# Altium PCB JacdacBrainNRF 57.PcbDoc (part 1 of 2)
Units mm, origin at the board's own origin, x right, y up, seen from the top; angles counter-clockwise.
Board outline 33.2 x 27.66 mm, 2 copper layers (Top Layer, Bottom Layer), stack 1.525 mm thick; 62 components, 38 nets, 255 pads, 60 vias.
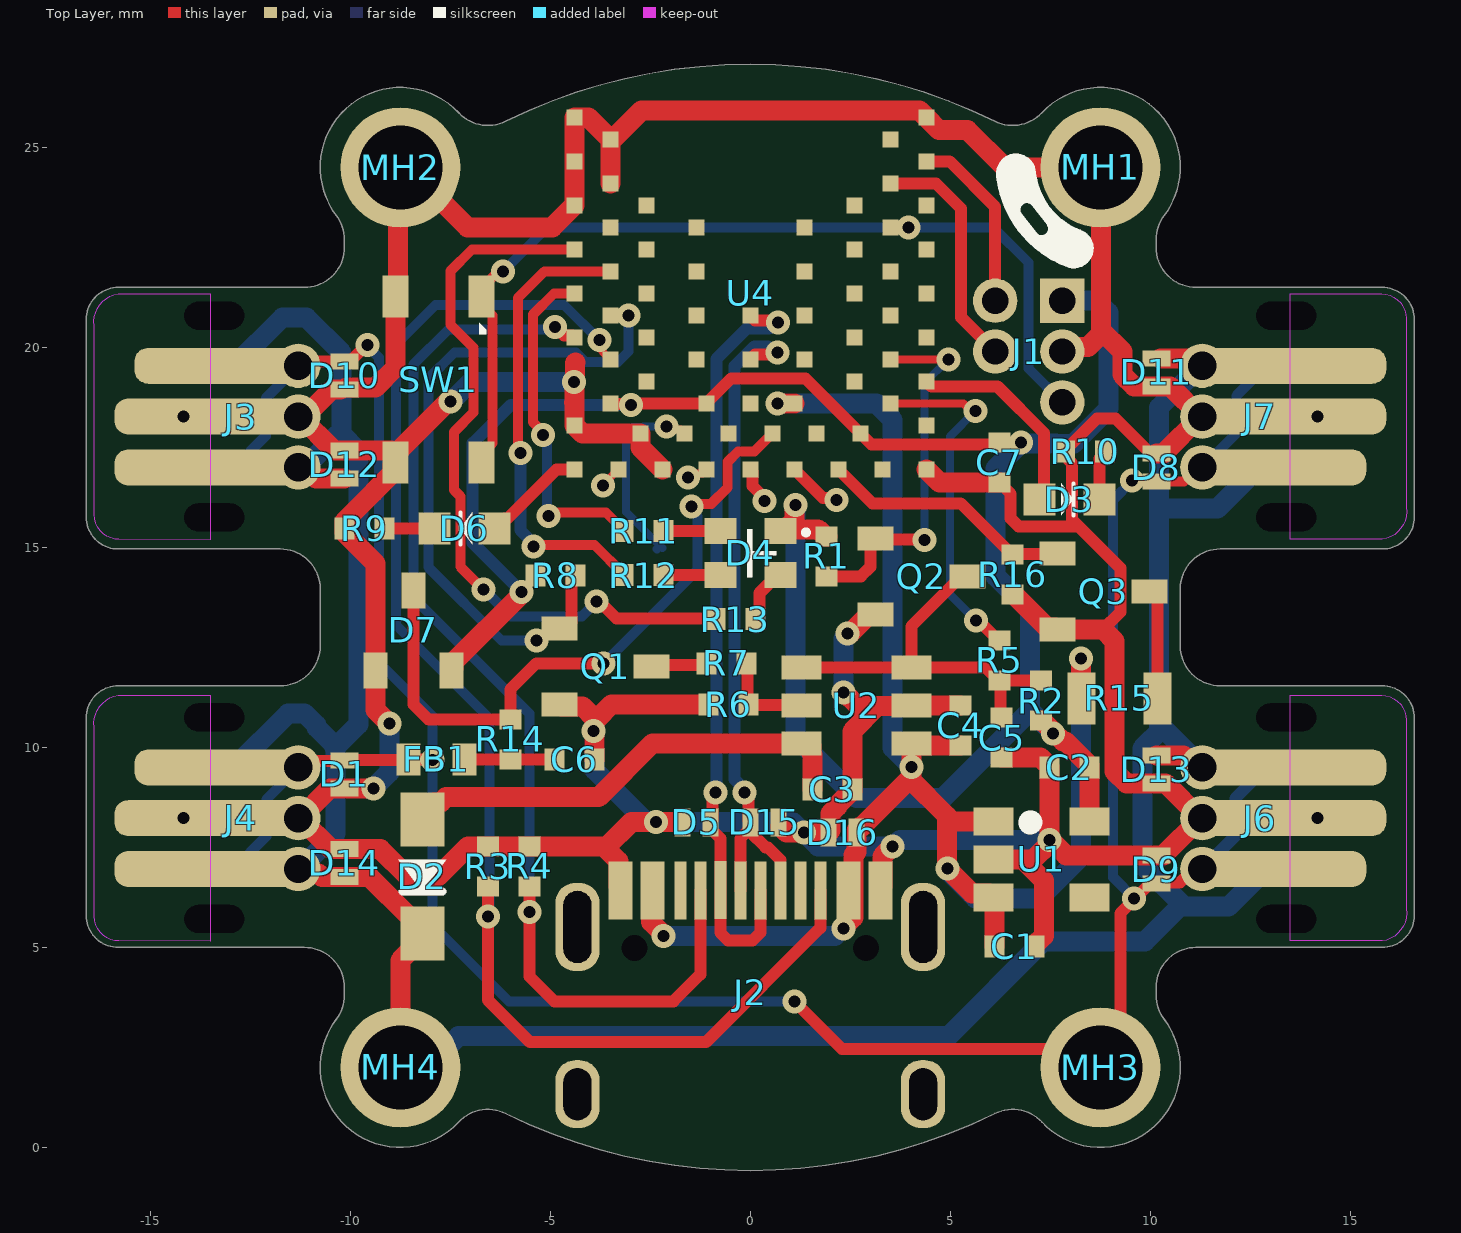
[diagram p0: Top Layer view]
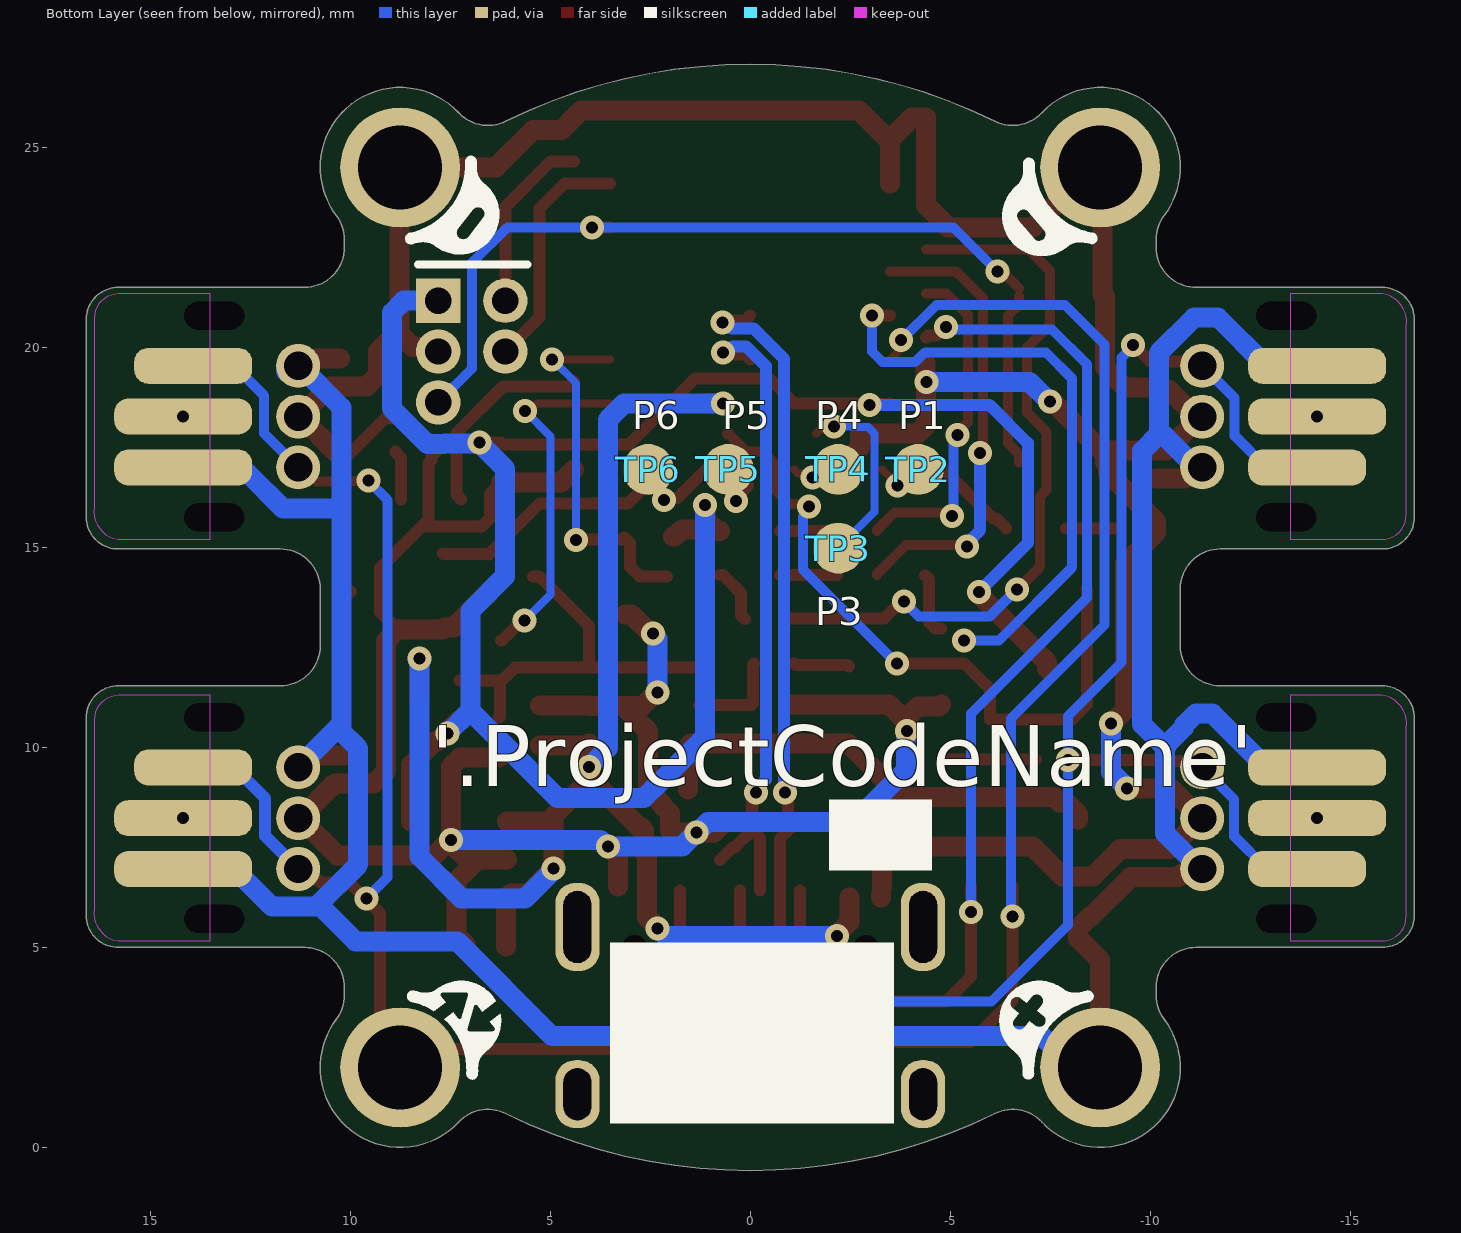
[diagram p1: Bottom Layer view, seen from below]

## Layer stack, top to bottom
Top Solder: solder mask 0.0102, Solder Resist, Dk 3.5
Top Layer: signal copper 0.0356
Dielectric 1: core 1.454, FR-4, Dk 4.2
Bottom Layer: signal copper 0.0356
Bottom Solder: solder mask 0.0102, Solder Resist, Dk 3.5

## Board outline
-16.601,5.8 ccw(c-15.802,5.799) -15.8,5 -11.75,5 -11.146,4.999 cw(c-11.147,3.999) -10.147,3.998 -10.147,3.803 cw(c-11.147,3.805) -10.349,3.203 ccw(c-8.751,2) -7.29,0.634 cw(c-6.56,-0.049) -6.118,0.848 ccw(c0,13.25) 6.117,0.848 cw(c6.559,-0.049) 7.289,0.634 ccw(c8.75,2) 10.348,3.203 cw(c11.146,3.805) 10.146,3.803 10.146,3.998 cw(c11.146,3.999) 11.145,4.999 11.749,5 15.799,5 ccw(c15.801,5.799) 16.6,5.8 16.6,10.74 ccw(c15.801,10.741) 15.799,11.54 11.749,11.54 cw(c11.749,12.54) 10.749,12.54 10.749,13.96 cw(c11.749,13.96) 11.749,14.96 15.799,14.96 ccw(c15.801,15.759) 16.6,15.76 16.6,20.7 ccw(c15.801,20.701) 15.799,21.5 11.749,21.5 11.145,21.501 cw(c11.146,22.501) 10.146,22.502 10.146,22.697 cw(c11.146,22.695) 10.348,23.297 ccw(c8.75,24.5) 7.289,25.866 cw(c6.559,26.549) 6.117,25.652 ccw(c-0.001,13.25) -6.118,25.652 cw(c-6.56,26.549) -7.29,25.866 ccw(c-8.751,24.5) -10.349,23.297 cw(c-11.147,22.695) -10.147,22.697 -10.147,22.502 cw(c-11.147,22.501) -11.146,21.501 -11.75,21.5 -15.8,21.5 ccw(c-15.802,20.701) -16.601,20.7 -16.601,15.76 ccw(c-15.802,15.759) -15.8,14.96 -11.75,14.96 cw(c-11.75,13.96) -10.75,13.96 -10.75,12.54 cw(c-11.75,12.54) -11.75,11.54 -15.8,11.54 ccw(c-15.802,10.741) -16.601,10.74

## Design rules (kind name [scope] priority, off if disabled: settings)
AssemblyTestPointUsage [All] p1: valid=2
BoardOutlineClearance [All] p1: gap=0.3 ignorepadtopadclearanceinfootprint=FALSE except(0: Arc-SplitContinuation Track-SplitContinuation SMDPad-OutlineEdge SMDPad-SplitContinuation THPad-OutlineEdge THPad-SplitContinuation Via-SplitContinuation Fill-SplitContinuation Poly-SplitContinuation Region-OutlineEdge Region-SplitContinuation Text-SplitContinuation; 0.2: Track-OutlineEdge Text-OutlineEdge)
Clearance [All] p1: gap=0.125 ignorepadtopadclearanceinfootprint=FALSE except(0: Arc-Hole Track-Hole SMDPad-Hole THPad-Hole Via-Hole Fill-Hole Poly-Hole Region-Hole Text-Hole)
ComponentClearance [All] p1: gap=0.2 collisioncheckmode=3 verticalgap=0.2 showdistances=FALSE
DiffPairsRouting [All] p1: maxlimit=2 minlimit=0.15 mostfreqgap=0.15 toplayer_minwidth=0.15 toplayer_maxwidth=2 toplayer_prefwidth=0.15 bottomlayer_minwidth=0.15 bottomlayer_maxwidth=2 bottomlayer_prefwidth=0.15 substack1={CB9D278B-8BF5-444A-AAF4-837A2A9DF42D} toplayer_{cb9d278b-8bf5-444a-aaf4-837a2a9df42d}_minwidth=0.381 toplayer_{cb9d278b-8bf5-444a-aaf4-837a2a9df42d}_maxwidth=0.381 toplayer_{cb9d278b-8bf5-444a-aaf4-837a2a9df42d}_prefwidth=0.381 bottomlayer_{cb9d278b-8bf5-444a-aaf4-837a2a9df42d}_minwidth=0.381 bottomlayer_{cb9d278b-8bf5-444a-aaf4-837a2a9df42d}_maxwidth=0.381 bottomlayer_{cb9d278b-8bf5-444a-aaf4-837a2a9df42d}_prefwidth=0.381 substack2={826B8647-A721-4255-895A-19F9591B9CD1} toplayer_{826b8647-a721-4255-895a-19f9591b9cd1}_minwidth=0.381 toplayer_{826b8647-a721-4255-895a-19f9591b9cd1}_maxwidth=0.381 toplayer_{826b8647-a721-4255-895a-19f9591b9cd1}_prefwidth=0.381 bottomlayer_{826b8647-a721-4255-895a-19f9591b9cd1}_minwidth=0.381 bottomlayer_{826b8647-a721-4255-895a-19f9591b9cd1}_maxwidth=0.381 bottomlayer_{826b8647-a721-4255-895a-19f9591b9cd1}_prefwidth=0.381 substack3={E64FCAF4-1BC8-437D-B1E0-0E5F2DC0F59E} toplayer_{e64fcaf4-1bc8-437d-b1e0-0e5f2dc0f59e}_minwidth=0.381 toplayer_{e64fcaf4-1bc8-437d-b1e0-0e5f2dc0f59e}_maxwidth=0.381 toplayer_{e64fcaf4-1bc8-437d-b1e0-0e5f2dc0f59e}_prefwidth=0.381 bottomlayer_{e64fcaf4-1bc8-437d-b1e0-0e5f2dc0f59e}_minwidth=0.381 bottomlayer_{e64fcaf4-1bc8-437d-b1e0-0e5f2dc0f59e}_maxwidth=0.381 bottomlayer_{e64fcaf4-1bc8-437d-b1e0-0e5f2dc0f59e}_prefwidth=0.381 substack4={E61CE66C-507C-4E1E-8E83-C905434AFC1C} toplayer_{e61ce66c-507c-4e1e-8e83-c905434afc1c}_minwidth=0.381 toplayer_{e61ce66c-507c-4e1e-8e83-c905434afc1c}_maxwidth=0.381 toplayer_{e61ce66c-507c-4e1e-8e83-c905434afc1c}_prefwidth=0.381 bottomlayer_{e61ce66c-507c-4e1e-8e83-c905434afc1c}_minwidth=0.381 bottomlayer_{e61ce66c-507c-4e1e-8e83-c905434afc1c}_maxwidth=0.381 bottomlayer_{e61ce66c-507c-4e1e-8e83-c905434afc1c}_prefwidth=0.381 maxuncoupledlength=25
FabricationTestPointUsage [All] p1: valid=2 allowmultiple=FALSE
HoleSize [All] p1: absolutevalues=TRUE maxlimit=2.54 minlimit=0.2 maxpercent=80.000 minpercent=20.000
MatchedLengths USB_DATA [InDifferentialPair('USB_D')] p1: tolerance=25.4 checknetsindiffpair=FALSE checkdiffpairvsdiffpair=TRUE checkxsignals=TRUE checkothers=TRUE
MinimumSolderMaskSliver [All] p1: minsoldermaskwidth=0.005
PlaneClearance [All] p1: clearance=0.3
PlaneConnect [All] p1: planeconnectstyle=Relief reliefexpansion=0.5 reliefentries=4 reliefconductorwidth=0.2 reliefairgap=0.3
PolygonConnect "PolygonConnect GND" [isVIA] p1: connectstyle=Relief reliefconductorwidth=0.2 reliefentries=4 polygonreliefangle="90 Angle" airgapwidth=0.2
PolygonConnect [All] p2: connectstyle=Relief reliefconductorwidth=0.2 reliefentries=4 polygonreliefangle="90 Angle" airgapwidth=0.2
RoutingVias [All] p1: holewidth=0.3 width=0.6 viastyle="Through Hole" minholewidth=0.3 minwidth=0.6 maxholewidth=0.3 maxwidth=0.8
SignalStimulus "Schematic Signal Stimulus_1" [InNet('USB_D_P')] p1: kind=1 level=1 starttime=0.000 stoptime=500.0m periodtime=1.000
SignalStimulus "Schematic Signal Stimulus" [InNet('USB_D_N')] p2: kind=1 level=1 starttime=0.000 stoptime=41.67n periodtime=83.33n
SilkToSilkClearance [All] p1: silktosilkclearance=0.001
SilkToSolderMaskClearance [IsPad] p1: minsilkscreentomaskgap=0.05 clearancetoexposedcopper=TRUE
SolderMaskExpansion TENTED_VIA [IsVia] p1: expansion=0.102 istentingtop=TRUE
SolderMaskExpansion [All] p2: expansion=0.075 istentingtop=FALSE
Width [All] p1: maxlimit=2 minlimit=0.152 preferedwidth=0.152 substack1={CB9D278B-8BF5-444A-AAF4-837A2A9DF42D} toplayer_{cb9d278b-8bf5-444a-aaf4-837a2a9df42d}_minwidth=0.15 toplayer_{cb9d278b-8bf5-444a-aaf4-837a2a9df42d}_prefwidth=0.15 bottomlayer_{cb9d278b-8bf5-444a-aaf4-837a2a9df42d}_minwidth=0.15 bottomlayer_{cb9d278b-8bf5-444a-aaf4-837a2a9df42d}_prefwidth=0.15 substack2={826B8647-A721-4255-895A-19F9591B9CD1} toplayer_{826b8647-a721-4255-895a-19f9591b9cd1}_minwidth=0.15 toplayer_{826b8647-a721-4255-895a-19f9591b9cd1}_prefwidth=0.15 bottomlayer_{826b8647-a721-4255-895a-19f9591b9cd1}_minwidth=0.15 bottomlayer_{826b8647-a721-4255-895a-19f9591b9cd1}_prefwidth=0.15 substack3={E64FCAF4-1BC8-437D-B1E0-0E5F2DC0F59E} toplayer_{e64fcaf4-1bc8-437d-b1e0-0e5f2dc0f59e}_minwidth=0.15 toplayer_{e64fcaf4-1bc8-437d-b1e0-0e5f2dc0f59e}_prefwidth=0.15 bottomlayer_{e64fcaf4-1bc8-437d-b1e0-0e5f2dc0f59e}_minwidth=0.15 bottomlayer_{e64fcaf4-1bc8-437d-b1e0-0e5f2dc0f59e}_prefwidth=0.15 substack4={E61CE66C-507C-4E1E-8E83-C905434AFC1C} toplayer_{e61ce66c-507c-4e1e-8e83-c905434afc1c}_minwidth=0.15 toplayer_{e61ce66c-507c-4e1e-8e83-c905434afc1c}_prefwidth=0.15 bottomlayer_{e61ce66c-507c-4e1e-8e83-c905434afc1c}_minwidth=0.15 bottomlayer_{e61ce66c-507c-4e1e-8e83-c905434afc1c}_prefwidth=0.15 minimp=50.000000 maximp=50.000000 favimp=50.000000
20 further rules are at their usual default settings.

## Classes and differential pairs
differential pair USB_D: +USB_D_P -USB_D_N

## Components (designator, comment, footprint, x,y, rotation, side; value= is the part's Value field where it differs from the comment)
C1 "CL05A105KP5NNNC" "C0402_0.55MM - without outline" 6.6,5.025 r180 top
C2 "CL05A105KP5NNNC" "C0402_0.55MM - without outline" 7.975,9.5 r0 top
C3 "CL05A475MP5NRNC" "R0402 - Without outline" 2.05,8.95 r180 top
C4 "CL05A475MP5NRNC" "R0402 - Without outline" 5.25,10.55 r270 top
C5 "CL05A475MP5NRNC" "R0402 - Without outline" 6.284,10.241 r90 top
C6 "CL05C330JB51PNC" "C0402_0.55MM - without outline" -4.4,9.7 r180 top
C7 "CL05A475MP5NRNC" "R0402 - Without outline" 6.225,17.125 r90 top
D1 "RCLAMP0521P-N" "TVS 0402 - L" -10.15,9.325 r270 top
D2 "MBR120VLSFT3G" MBR120VLSFT3G -8.2,6.775 r90 top
D3 "Everlight Elec'''" "0603 Green" 7.975,16.197 r180 top
D4 "TZ-P4-1615RGBTCA1-0.55T" TZ-P4-1615RGBTCA1-0.55T 0,14.855 r180 top
D5 "RCLAMP0521P-N" "TVS 0402 - L" -1.35,8.125 r180 top
D6 "Everlight Elec'''" "0603 Orange" -7.15,15.475 r0 top
D7 "BAT54S" NXP-BAT54S-TO-236AB -8.425,12.925 r90 top
D8 "RCLAMP0521P-N" "TVS 0402 - L" 10.15,17 r90 top
D9 "RCLAMP0521P-N" "TVS 0402 - L" 10.15,6.95 r90 top
D10 "RCLAMP0521P-N" "TVS 0402 - L" -10.15,19.3 r270 top
D11 "RCLAMP0521P-N" "TVS 0402 - L" 10.15,19.375 r270 top
D12 "RCLAMP0521P-N" "TVS 0402 - L" -10.15,17.075 r90 top
D13 "RCLAMP0521P-N" "TVS 0402 - L" 10.15,9.45 r270 top
D14 "RCLAMP0521P-N" "TVS 0402 - L" -10.15,7.104 r90 top
D15 "RCLAMP0521P-N" "TVS 0402 - L" 0.35,8.125 r0 top
D16 "RCLAMP0521P-N" "TVS 0402 - L" 2.3,7.875 r180 top
FB1 "TDK MPZ1608S102ATA00" "TDK MPZ1608 0.8mm - without outline" -7.85,9.7 r0 top
J1 "Hack Connect Mini 1.27 mm pitch 2-row" HACK_CONNECT_MINI_5_X_1_27 7.8,21.166 r180 top
J2 "TYPE-C-31-M-12" TYPE-C-31-M-12 0,6.425 r0 top
J3 "3 pin JACDAC edge connector" JACDAC_EDGE_CONNECTOR_NO_TRACES#1 -10.75,18.27 r90 top
J4 "3 pin JACDAC edge connector" JACDAC_EDGE_CONNECTOR_NO_TRACES#2 -10.75,8.23 r90 top
J6 "3 pin JACDAC edge connector" JACDAC_EDGE_CONNECTOR_NO_TRACES#1 10.75,8.23 r270 top
J7 "3 pin JACDAC edge connector" JACDAC_EDGE_CONNECTOR_NO_TRACES#1 10.75,18.27 r270 top
MH1 "MH_5.0MMK_3.0MMC_2.1MMD_PTH" MH_5.0MMK_3.0MMC_2.1MMD_PTH 8.75,24.5 r0 top
MH2 "MH_5.0MMK_3.0MMC_2.1MMD_PTH" MH_5.0MMK_3.0MMC_2.1MMD_PTH -8.75,24.5 r180 top
MH3 "MH_5.0MMK_3.0MMC_2.1MMD_PTH" MH_5.0MMK_3.0MMC_2.1MMD_PTH 8.75,2 r270 top
MH4 "MH_5.0MMK_3.0MMC_2.1MMD_PTH" MH_5.0MMK_3.0MMC_2.1MMD_PTH -8.75,2 r270 top
Q1 "2N7002K-T1-GE3" "SOT-23-3 (TO-236)" -3.625,12.025 r0 top
Q2 "2N7002K-T1-GE3" "SOT-23-3 (TO-236)" 4.275,14.275 r0 top
Q3 "2N7002K-T1-GE3" "SOT-23-3 (TO-236)" 8.825,13.9 r0 top
R1 "" "R0402 - Without outline" 1.9,14.775 r270 top
R2 "RC0402FR-07330KL" "R0402 - Without outline" 7.274,11.166 r90 top
R3 "RC0402JR-075K1L" "R0402 - Without outline" -6.56,7.025 r90 top
R4 "RC0402JR-075K1L" "R0402 - WITHOUT OUTLINE" -5.525,7.025 r90 top
R5 "RC0402FR-07150RL" "R0402 - Without outline" 6.225,12.175 r270 top
R6 "RC0402FR-0752K3L" "R0402 - Without outline" -0.55,11.075 r0 top
R7 "RT0402FRE0768KL" "R0402 - Without outline" -0.6,12.1 r0 top
R8 "" "R0402 - Without outline" -4.875,14.3 r0 top
R9 "RC0402FR-07150RL" "R0402 - Without outline" -9.65,15.475 r180 top
R10 "RC0402FR-07150RL" "R0402 - Without outline" 8.374,17.399 r180 top
R11 "RC0402FR-0730RL" "R0402 - Without outline" -2.663,15.405 r180 top
R12 "RC0402FR-0730RL" "R0402 - Without outline" -2.663,14.305 r180 top
R13 "RC0402FR-07150RL" "R0402 - Without outline" -0.37,13.206 r180 top
R14 "RC0402FR-07220RL" "R0402 - Without outline" -6,10.2 r270 top
R15 "CRGP0805F100R" RES0805 9.225,11.225 r180 top
R16 "RC0402FR-07100KL" "R0402 - Without outline" 6.559,14.326 r90 top
SW1 "UK-B0267-SP25Y" USAKRO-UK-B0267-SP25Y -7.8,19.2 r270 top
TP2 "TestPoint" Pad1.27mm#1 -4.575,16.963 r180 bottom
TP3 "TestPoint" Pad1.27mm#2 -2.377,14.98 r180 bottom
TP4 "TestPoint" Pad1.27mm#3 -2.2,16.963 r180 bottom
TP5 "TestPoint" Pad1.27mm#4 0.55,17.375 r180 bottom
TP6 "TestPoint" Pad1.27mm#5 2.25,17.7 r180 bottom
U1 "LDO 3.3V/300 mA" "ON_SEMI-SOT23-5 - without outline" 7.275,7.2 r0 top
U2 "TPS2553DBVR" TI-TPS2553 2.65,11.05 r180 top
U4 "Fanstel Nordic NRF52833 module" BM833 0,23.4 r0 top

## Footprints (in the part's own frame and the unit in brackets; to place one, negate y for a bottom-side part, rotate by r counter-clockwise, add the part's x,y. Pads: shape width x height; smd on the part's side, far side on the other; paste and mask are expansions set on the pad)
"0603 Green" [mm]
  rect 0.8x0.8 smd paste-0.05: 1(-0.75,0) 2(0.75,0)
  silkscreen extent -0.1,-0.4 0.2,0.4, body extent -0.79,-0.4 0.81,0.4, height 0.4
"0603 Orange" [mm]
  rect 0.8x0.8 smd paste-0.05: 1(-0.75,0) 2(0.75,0)
  silkscreen extent -0.1,-0.4 0.2,0.4, body extent -0.79,-0.4 0.81,0.4, height 0.4
BM833 [mm]
  rect 0.4x0.4 smd paste-0.254: 1(-4.4,2.35) 2(-3.5,1.8) 3(-4.4,1.25) 4(-3.5,0.7) 5(-4.4,0.15) 6(-3.5,-0.4) 7(-4.4,-0.95) 8(-3.5,-1.5) 9(-4.4,-2.05) 10(-3.5,-2.6) 11(-4.4,-3.15) 12(-3.5,-3.7) 13(-4.4,-4.25) 14(-3.5,-4.8) 15(-4.4,-5.35) 16(-4.4,-6.45) 17(-3.3,-6.45) 18(-2.75,-5.55) 19(-2.2,-6.45) 20(-1.65,-5.55) 21(-1.1,-6.45) 22(-0.55,-5.55) 23(0,-6.45) 24(0.55,-5.55) 25(1.1,-6.45) 26(1.65,-5.55) 27(2.2,-6.45) 28(2.75,-5.55) 29(3.3,-6.45) 30(4.4,-6.45) 31(4.4,-5.35) 32(3.5,-4.8) 33(4.4,-4.25) 34(3.5,-3.7) 35(4.4,-3.15) 36(3.5,-2.6) 37(4.4,-2.05) 38(3.5,-1.5) 39(4.4,-0.95) 40(3.5,-0.4) 41(4.4,0.15) 42(3.5,0.7) 43(4.4,1.25) 44(3.5,1.8) 45(4.4,2.35) 46(1.35,-0.4) 47(-1.35,-0.4) 48(-2.6,0.15) 49(-2.6,-0.95) 50(-1.35,-1.5) 51(-2.6,-2.05) 52(-1.35,-2.6) 53(-2.6,-3.15) 54(-1.35,-3.7) 55(-2.6,-4.25) 56(-1.1,-4.8) 57(0,-4.8) 58(1.1,-4.8) 59(2.6,-4.25) 60(1.35,-3.7) 61(2.6,-3.15) 62(1.35,-2.6) 63(2.6,-2.05) 64(1.35,-1.5) 65(2.6,-0.95) 66(2.6,0.15) 67(0,-3.7) 68(0,-2.6)
  body extent -5.1,-7.3 5.1,7.5, height 2
"C0402_0.55MM - without outline" [mm]
  rect 0.5x0.55 smd: 1(-0.5,0) 2(0.5,0)
  body extent -0.5,-0.25 0.5,0.25, height 0.55
HACK_CONNECT_MINI_5_X_1_27 [mm]
  rect 1.11x1.11 hole 0.66: 1(0,0)
  round 1.11 hole 0.66: 2(1.676,0) 3(0,1.27) 4(1.676,1.27) 5(0,2.54)
JACDAC_EDGE_CONNECTOR_NO_TRACES#1 [mm] "JacDac 3 pin connector with no traces"
  rrect78% 0.9x2.95 smd far side paste-1 mask+0: 1(-1.27,3.175)
  rrect78% 0.9x4.3 smd paste-1 mask+0: 1(1.27,2.5)
  round 1.11 / inner round 0.71 / far side round 1.1 hole 0.71 paste-0.254 mask+0: 1(1.27,0.55) 2(0,0.55) 3(-1.27,0.55)
  rrect78% 0.9x3.45 smd far side paste-1 mask+0: 2(0,3.425) 3(1.27,3.425)
  rrect78% 0.9x4.8 smd paste-1 mask+0: 2(0,2.75) 3(-1.27,2.75)
  round 0 hole 0.7 slot 1.5 at 90 deg unplated: ""(-2.52,2.65) ""(2.52,2.65)
  Top Layer keep-out region: -3.075,2.75 -3.07,5.033 -2.987,5.341 -2.761,5.567 -2.453,5.65 -2.453,5.65 2.27,5.65 2.545,5.635 2.794,5.516 2.978,5.31 3.07,5.05 3.07,5.05 3.07,2.75
  Bottom Layer lines w0.2: -1.27,0.85 -1.126,0.85
  Bottom Layer keep-out region: -3.07,2.75 -3.07,5.033 -3.023,5.269 -2.889,5.469 -2.689,5.603 -2.453,5.65 -2.453,5.65 2.27,5.65 2.545,5.635 2.794,5.516 2.978,5.31 3.07,5.05 3.07,5.05 3.07,2.75
JACDAC_EDGE_CONNECTOR_NO_TRACES#2 [mm] "JacDac 3 pin connector with no traces"
  rrect78% 0.9x2.95 smd far side paste-1 mask+0: 1(-1.27,3.175)
  rrect78% 0.9x4.3 smd paste-1 mask+0: 1(1.27,2.5)
  round 1.11 / inner round 0.71 / far side round 1.1 hole 0.71 paste-0.254 mask+0: 1(1.27,0.55) 2(0,0.55) 3(-1.27,0.55)
  rrect78% 0.9x3.45 smd far side paste-1 mask+0: 2(0,3.425) 3(1.27,3.425)
  rrect78% 0.9x4.8 smd paste-1 mask+0: 2(0,2.75) 3(-1.27,2.75)
  round 0 hole 0.7 slot 1.5 at 90 deg unplated: ""(-2.52,2.65) ""(2.52,2.65)
  Top Layer keep-out region: -3.075,2.75 -3.07,5.033 -2.987,5.341 -2.761,5.567 -2.453,5.65 -2.453,5.65 2.27,5.65 2.545,5.635 2.794,5.516 2.978,5.31 3.07,5.05 3.07,5.05 3.07,2.75
  Bottom Layer keep-out region: -3.07,2.75 -3.07,5.033 -3.023,5.269 -2.889,5.469 -2.689,5.603 -2.453,5.65 -2.453,5.65 2.27,5.65 2.545,5.635 2.794,5.516 2.978,5.31 3.07,5.05 3.07,5.05 3.07,2.75
MBR120VLSFT3G [mm] "SODFL, 2-Leads, Body 1.65x3.60mm, IPC Medium Density"
  rect 1.35x1.1 smd: 1(-1.425,0) 2(1.425,0)
  silkscreen extent -0.38,-0.6 0.42,0.6, body extent -1.73,-0.82 1.72,0.82, height 0.95
MH_5.0MMK_3.0MMC_2.1MMD_PTH [mm] "Mounting Hole 5.0mm clearance, 3.1 annualar ring and 2.1mm PTH"
  round 3 hole 2.1 mask+0.05: 1(0,0)
NXP-BAT54S-TO-236AB [mm] "SOT23, 3-Leads, Body 2.90x2.30mm, Pitch 0.95mm, IPC Medium Density"
  rect 0.9x0.6 smd: 1(-1,0.95) 2(-1,-0.95) 3(1,0)
  body extent -1.32,-1.5 1.32,1.5, height 1.12
"ON_SEMI-SOT23-5 - without outline" [mm]
  rect 1x0.7 smd: 1(-1.2,0.95) 2(-1.2,0) 3(-1.2,-0.95) 4(1.2,-0.95) 5(1.2,0.95)
  silkscreen extent -0.32,0.88 -0.23,0.97, body extent -1.5,-1.57 1.5,1.58, height 1.1
Pad1.27mm#1 [mm] "1.27mm dia round pad"
  round 1.27 smd paste-2.54: 1(-0.375,-0.013)
Pad1.27mm#2 [mm] "1.27mm dia round pad"
  round 1.27 smd paste-2.54: 1(-0.177,0)
Pad1.27mm#3 [mm] "1.27mm dia round pad"
  round 1.27 smd paste-2.54: 1(0,-0.013)
Pad1.27mm#4 [mm] "1.27mm dia round pad"
  round 1.27 smd paste-2.54: 1(0,-0.425)
Pad1.27mm#5 [mm] "1.27mm dia round pad"
  round 1.27 smd paste-2.54: 1(-0.3,-0.75)
"R0402 - Without outline" [mm]
  rect 0.5x0.55 smd: 1(-0.5,0) 2(0.5,0)
  body extent -0.5,-0.25 0.5,0.25, height 0.35
"R0402 - WITHOUT OUTLINE" [mm]
  rect 0.5x0.55 smd: 1(-0.5,0) 2(0.5,0)
  body extent -0.5,-0.25 0.5,0.25, height 0.35
RES0805 [mm] "Chip Resistor, 2-Leads, Body 2.03x1.27mm, IPC Medium Density"
  rect 0.7x1.3 smd: 1(-0.95,0) 2(0.95,0)
  body extent -1,-0.58 1,0.58, height 0.65
"SOT-23-3 (TO-236)" [mm] "SOT23, 3-Leads, Body 2.90x2.30mm, Pitch 0.95mm, IPC Medium Density"
  rect 0.9x0.6 smd: 1(-1.15,0.95) 2(-1.15,-0.95) 3(1.15,0)
  body extent -1.32,-1.5 1.32,1.5, height 1.12
"TDK MPZ1608 0.8mm - without outline" [mm]
  rect 0.6x0.8 smd paste-0.1: 1(-0.7,0) 2(0.7,0)
  body extent -0.8,-0.4 0.8,0.4, height 0.8
TI-TPS2553 [mm] "SOT23, 6-Leads, Body 2.90x2.80mm, Pitch 0.95mm, IPC Medium Density"
  rect 1x0.6 smd: 1(-1.375,0.95) 2(-1.375,0) 3(-1.375,-0.95) 4(1.375,-0.95) 5(1.375,0) 6(1.375,0.95)
  body extent -1.52,-1.52 1.53,1.53, height 1.1
"TVS 0402 - L" [mm] "TVS 0402 RoHS"
  rect 0.4x0.7 smd paste-0.038 mask+0.05: 1(-0.35,0) 2(0.35,0)
  body extent -0.5,-0.3 0.5,0.3, height 0.5
TYPE-C-31-M-12 [mm] "USB - Type C Female 16 8.94*7.3mm USB Connectors RoHS"
  rrect90% 1.1x2.2 hole 0.7 slot 1.8 at 90 deg: 1(-4.32,-0.915) 4(4.32,-0.915)
  rrect90% 0x0 hole 0.65 unplated: 1(-2.89,-1.445)
  round 0 hole 0.65 unplated: 1(2.89,-1.445)
  rrect90% 1.1x1.7 hole 0.7 slot 1.3 at 90 deg: 2(-4.32,-5.095) 3(4.32,-5.095)
  rect 0.3x1.45 smd paste-0.254 mask+0.05: A1(-3.4,0)
  rect 0.3x1.45 smd mask+0.05: A4(-2.6,0) A5(-1.25,0) A6(-0.25,0) A7(0.25,0) A8(1.25,0) A9(2.6,0) A12(3.4,0) B1(3.1,0) B4(2.3,0) B5(1.75,0) B6(0.75,0) B7(-0.75,0.006) B8(-1.75,0) B9(-2.3,0) B12(-3.1,0)
  body extent -4.47,-7.7 4.47,0.21, height 3.31
TZ-P4-1615RGBTCA1-0.55T [mm] "1615 Light Emitting Diodes (LED) RoHS"
  rect 0.8x0.65 smd mask+0.05: 1(-0.75,-0.55) 2(-0.75,0.55) 3(0.75,0.55) 4(0.75,-0.55)
  silkscreen extent -1.44,-0.6 0.07,0.6, body extent -0.8,-0.75 0.8,0.75, height 0.55
USAKRO-UK-B0267-SP25Y [mm] "4.20mm x 3.20mm"
  rect 1.05x0.65 smd: 1(-2.075,1.075) 2(2.075,1.075) 3(-2.075,-1.075) 4(2.075,-1.075)
  silkscreen extent -1.41,1.02 -1.12,1.2, body extent -2.29,-1.6 2.29,1.6, height 2.5

## Part data
C1 C2: "CAP CER 1UF 10V X5R 0402", Capacitance=1µF, Case Code (Imperial)=0402, Case Code (Metric)=1005, Dielectric=X5R, Manufacturer=Samsung, Max Operating Temperature=85°C, Min Operating Temperature=-55°C, Package Quantity=1, Supplier Part Number 1=1276-1076-1-ND, Tolerance=10%, Voltage Rating=10V, Case/Package=0402, Category=Capacitors, Checked=?, ComponentLink1Description="Online datasheet", ComponentLink1URL=https://datasheet.ciiva.com/15195/getdatasheetpartid-358390-15195630.pdf, Contact Plating=Tin, Created=DG, Depth=0.5mm, Height=0.5mm, Length=1mm, Manufacturer Part Number=CL05A105KP5NNNC, Material=Ceramic, Mount="Surface Mount", Packaging="Tape and Reel", Pricing 1="1=0.10000, 10=0.03900, 50=0.02100, 100=0.01720, 500=0.01228, 1000=0.00965, 2500=0.00877, 5000=0.00807 (USD)", Pricing 2="1=0.10000, 10=0.04200, 100=0.01800, 500=0.01300, 1000=0.01000, 2500=0.00900 (USD)", Pricing 3="10=0.02450, 100=0.02000, 500=0.01310, 2500=0.00920, 5000=0.00810, 10000=0.00640, 50000=0.00490 (GBP)", Radiation Hardening=No, RoHS=Yes, Stock 1=5705569, Stock 2=928941, Stock 3=53670, Supplier 1=Digi-Key, Supplier 2=Mouser, Supplier 3=Farnell, Supplier Part Number 2=187-CL05A105KP5NNNC, Supplier Part Number 3=3013329, Thickness=0.022inch, Width=0.02inch
C3 C4 C5 C7: "CAP CER 4.7UF 10V X5R 0402", Capacitance=4.7uF, Case Code (Imperial)=0402, Case Code (Metric)=1005, Dielectric=X5R, Manufacturer=Samsung, Max Operating Temperature=85°C, Min Operating Temperature=-55°C, Package Quantity=10000, Supplier Part Number 1=1276-1482-2-ND, Tolerance=20%, Voltage Rating=10V, Case/Package=0402, Category="Ceramic Capacitors", Checked By=?, ComponentLink1Description="Online datasheet", ComponentLink1URL=https://datasheet.ciiva.com/25786/cl05a475mp5nrnc-25786963.pdf, Created By="D. Gakure", Lead Free="Lead Free", Length=0.039inch, Manufacturer Part Number=CL05A475MP5NRNC, Mount="Surface Mount", Packaging="Tape and Reel", Pricing 1="10000=0.01405, 20000=0.01338 (USD)", Pricing 2="1=0.23500, 500=0.03970, 1500=0.02900, 2500=0.02500, 5000=0.02050 (USD)", RoHS=Yes, RoHS Compliant=Yes, Series=CL, Stock 1=840000, Stock 2=2004, Supplier 1=Digi-Key, Supplier 2="Future Electronics", Supplier Part Number 2=2103694, Thickness=0.022inch, Width=0.02inch
C6: "CAP CER 33PF 50V NP0 0402", Capacitance=33pF, Case Code (Imperial)=0402, Case Code (Metric)=1005, Manufacturer=Samsung, Max Operating Temperature=125°C, Min Operating Temperature=-55°C, Ratings=AEC-Q200, Supplier Part Number 1=1276-6515-1-ND, Tolerance=5%, Voltage Rating=50V, Case/Package=0402, Category=Capacitors, Checked=?, ComponentLink1Description="Samsung datasheet online", ComponentLink1URL=http://www.samsungsem.com/kr/support/library/product-catalog/mlcc.jsp, Created=DG, Lead Free="Lead Free", Length=0.039inch, Manufacturer Part Number=CL05C330JB51PNC, Mount="Surface Mount", Packaging="Tape and Reel", Pricing 1="1=0.10000, 10=0.07500, 50=0.04060, 100=0.03320, 500=0.02374, 1000=0.01865, 2500=0.01696, 5000=0.01560 (USD)", Pricing 2="1=0.11000, 10=0.08200, 100=0.03600, 500=0.02600, 1000=0.02000, 2500=0.01800 (USD)", Pricing 3="10000=0.00780 (USD)", RoHS=Yes, Stock 1=250654, Stock 2=97900, Stock 3=100000, Supplier 1=Digi-Key, Supplier 2=Mouser, Supplier 3="Future Electronics", Supplier Part Number 2=187-CL05C330JB51PNC, Supplier Part Number 3=6022520, Thickness=0.022inch, Width=0.02inch
D1 D5 D8 D9 D10 D11 D12 D13 D14 D15 D16: "Bidirectional 5V (Max) 6V 16V 3.5A (8/20us) 0402 TVS RoHS", Manufacturer="Born Semiconductor", Package=0402, Supplier1 Part Number=C316043, Checked By=?, ComponentLink1Description="Online datasheet", ComponentLink1URL=https://datasheet.lcsc.com/szlcsc/Bourne-Semicon-Shenzhen-RCLAMP0521P-N_C316043.pdf, Created By="D Gakure", Manufacturer Part Number=RCLAMP0521P-N, Supplier1=LCSC
D2: "DIODE SCHOTTKY 20V 1A SOD123FL", Average Rectified Current=1A, Forward Voltage=340mV, Manufacturer="ON Semiconductor", Max Forward Surge Current (Ifsm)=45A, Max Operating Temperature=125°C, Max Repetitive Reverse Voltage (Vrrm)=20V, Max Reverse Leakage Current=600uA, Min Operating Temperature=-65°C, Package Quantity=10000, Supplier Part Number 1=MBR120VLSFT3GOSCT-ND, Category="Schottky Diodes", ComponentLink4Description="On Semi datasheet online", ComponentLink4URL=https://datasheet.ciiva.com/6380/mbr120vlsft1-d-6380910.pdf, Current Rating=1A, Element Configuration=Single, Forward Current=1A, Halogen Free="Halogen Free", Lead Free="Lead Free", Manufacturer Part Number=MBR120VLSFT3G, Max Reverse Voltage (DC)=20V, Max Surge Current=45A, Number of Pins=2, Output Current=1A, Packaging="Tape and Reel", Peak Non-Repetitive Surge Current=45A, Peak Reverse Current=600uA, Polarity=Standard, Pricing 1="1=0.39000, 10=0.28600, 100=0.19920, 500=0.12616, 1000=0.10292, 2000=0.09960, 5000=0.09628 (USD)", Radiation Hardening=No, REACH SVHC="No SVHC", RoHS=Yes, Stock 1=32481, Supplier 1=Digi-Key, Supplier 2=Mouser, Supplier 3=RSComponents, Supplier Part Number 2=863-MBR120VLSFT3G, Supplier Part Number 3=1867479, Voltage Rating (DC)=20V
D3: library part 19-217/GHC-YR1S2/3T, "LED GREEN DIFFUSED 0603 SMD", Case Code (Imperial)=0603, Color=Green, Manufacturer="Everlight Elec", Supplier 1 Part Number=C72043, Case/Package=0603, Colour=Green, ComponentLink1Description="Online datasheet", ComponentLink1URL=https://datasheet.lcsc.com/lcsc/1811101510_Everlight-Elec-19-217-GHC-YR1S2-3T_C72043.pdf, Manufacturer Part Number=19-217/GHC-YR1S2/3T, Mount="Surface Mount", Supplier 1=LCSC
D4: "1615 Light Emitting Diodes (LED) RoHS", Manufacturer=TUOZHAN, Package=1615, Supplier 1 Part Number=C779813, Category=Optoelectronics, Checked By=?, ComponentLink1Description="Online datasheet", ComponentLink1URL=https://datasheet.lcsc.com/szlcsc/2009041238_TUOZHAN-TZ-P4-1615RGBTCA1-0-55T_C779813.pdf, Created By="D. Gakure", Manufacturer Part Number=TZ-P4-1615RGBTCA1-0.55T, Packaging="Tape & Reel (TR)", RoHS="RoHS Compliant", Size / Dimension=1.6x1.5mm, Supplier 1=LCSC
D6: library part 19-217/S2C-AQ1R1B/3T, "LED ORANGE DIFFUSED 0603 SMD", Case Code (Imperial)=0603, Color=Orange, Manufacturer="Everlight Elec", Supplier 1 Part Number=C146215, Case/Package=0603, Colour=Orange, ComponentLink1Description="Online datasheet", ComponentLink1URL=https://datasheet.lcsc.com/lcsc/1912171731_Everlight-Elec-19-217-S2C-AQ1R1B-3T_C146215.pdf, Manufacturer Part Number=19-217/S2C-AQ1R1B/3T, Mount="Surface Mount", Supplier 1=LCSC
D7: "DIODE ARRAY SCHOTTKY 30V SOT23", Manufacturer=Nexperia, Manufacturer Part Number=BAT54S,235, Supplier Part Number 1=1727-1868-1-ND, Category="Rectifier Diodes", ComponentLink1Description="NXP datasheet online", ComponentLink1URL=https://assets.nexperia.com/documents/data-sheet/BAT54_SER.pdf, Pricing 1="1=0.13000, 10=0.11900, 100=0.05610, 500=0.03326, 1000=0.02185, 5000=0.02138 (USD)", RoHS=No, Stock 1=14011, Supplier 1=Digi-Key, Supplier 2=Mouser, Supplier 3=RSComponents, Supplier Part Number 2=771-BAT54S235, Supplier Part Number 3=1707990
FB1: "0603 1k@100MHz 0.8A chip", Case Code (Imperial)=0603, Case Code (Metric)=1608, Current Rating=800mA, DC Resistance (DCR)=300mR, Manufacturer=TDK, Manufacturer Part Number=MPZ1608S102ATA00, Package Quantity=4000, Supplier Part Number 1=445-8694-1-ND, Tolerance=25%, Case/Package=0603, ComponentLink2Description="datasheet online", ComponentLink2URL=https://www.mouser.co.uk/datasheet/2/400/eads_commercial_power_mpz1608_en-923650.pdf, ComponentLink3Description=datasheet, ComponentLink3URL="Y:\System\Altium\Libraries 2014\TDK\Datasheets\eads_commercial_power_mpz1608_en-923650.pdf", Core Material=Ferrite, Height=0.037inch, Impedance="1kR @ 100MHz", Length=0.063inch, Max DC Current=800mA, Mount="Surface Mount", Packaging="Tape and Reel", Pricing 1="1=0.1, 10=0.079, 25=0.0716, 50=0.0644, 100=0.0472, 250=0.03432, 500=0.03146, 1000=0.02717 (USD)", Stock 1=113542, Supplier 1=Digi-Key, Supplier 2=Mouser, Supplier Part Number 2=810-MPZ1608S102ATA00, Width=0.031inch
J1: library part HACK_CONNECT_MINI
J2: "USB - Type C Female 16 USB Connectors RoHS", Manufacturer="Korean Hroparts Elec", Supplier 1 Part Number=C165948, Category="USB Connectors", ComponentLink1Description="Online datasheet", ComponentLink1URL=https://datasheet.lcsc.com/szlcsc/1811131825_Korean-Hroparts-Elec-TYPE-C-31-M-12_C165948.pdf, Gender=Receptacle, Manufacturer Part Number=TYPE-C-31-M-12, Number of Positions=16, Orientation="Right Angle", RoHS=Yes, Supplier 1=LCSC
J3 J4 J6 J7: library part "Jacdac edge connector", "3 pin Jacdac edge connector 1.27mm pitch", Manufacturer Part Number=JACDAC_EDGE_CONNECTOR, Checked By=?, ComponentLink1Description="Yuliang JACDAC cable connector drawing online", ComponentLink1URL=https://github.com/microsoft/jacdac-mdk/blob/main/connector/JACDAC-Connector-by-Yuliang-2020-11-28.pdf, ComponentLink2Description="JACDAC PCB edge connector spec onlin", ComponentLink2URL=https://github.com/microsoft/jacdac-mdk/blob/main/connector/JACDAC_PCB_Edge_Connector_Drawing_JD-PEC-01_rev_01.pdf, Created By="D. Gakure", PCB Type="1.6mm FR4"
MH1 MH2 MH3 MH4: "Mounting Hole 5.0mm keepout, 3.0mm annualar ring and 2.1mm Drill PTH"
Q1 Q2 Q3: "Trans MOSFET N-CH Si 60V 0.3A 3-Pin SOT-23 T/R", Case/Package=SOT-23, Continuous Drain Current (ID)=300mA, Drain to Source Breakdown Voltage=60V, Drain to Source Resistance=2R, Gate to Source Voltage (Vgs)=20V, Input Capacitance=30pF, Manufacturer=Vishay, Max Operating Temperature=150°C, Max Power Dissipation=350mW, Min Operating Temperature=-55°C, Package Quantity=1, Supplier Part Number 1=2N7002K-T1-GE3CT-ND, Threshold Voltage=1V, Category=MOSFETs, ComponentLink1Description="Online datasheet", ComponentLink1URL=https://datasheet.ciiva.com/2957/2n7002k-2957216.pdf, Contact Plating=Tin,Matte, Drain to Source Voltage (Vdss)=60V, Element Configuration=Single, Height=1.02mm, Lead Free="Lead Free", Length=3.04mm, Manufacturer Part Number=2N7002K-T1-GE3, Mount="Surface Mount", Nominal Vgs=2V, Number of Channels=1, Number of Elements=1, Number of Pins=3, On-State Resistance=2R, Packaging="Tape and Reel", Power Dissipation=350mW, Pricing 1="1=0.27000, 10=0.21800, 25=0.18200, 100=0.11540, 500=0.07590, 1000=0.05161 (USD)", Pricing 2="100=0.11100 (USD)", Radiation Hardening=No, Rds On Max=2R, REACH SVHC=Unknown, RoHS=Yes, Stock 2=1, Supplier 1=Digi-Key, Supplier 2=RSComponents, Supplier Part Number 2=7879058P, Turn-Off Delay Time=35ns, Turn-On Delay Time=25ns, Voltage=60V, Weight=0.050717oz, Width=1.4mm
R1 R8: library part RC0402FR-071ML, "RES SMD 1M OHM 1% 1/16W 0402", Case Code (Imperial)=0402, Case Code (Metric)=1005, Manufacturer=Yageo, Max Operating Temperature=155°C, Max Power Dissipation=63mW, Min Operating Temperature=-55°C, Resistance=1MR, Resistance Tolerance=1%, Resistor Type="Thick Film", Supplier Part Number 1=311-1.00MLRCT-ND, Temperature Coefficient=100ppm/°C, Voltage Rating=50V, Case/Package=0402, Category="Chip SMD Resistors", Checked By=?, ComponentLink1Description="Online datasheet", ComponentLink1URL=https://datasheet.ciiva.com/11808/0900766b80c66297-11808125.pdf, Construction=Rectangular, Created By="D. Gakure", Depth=0.5mm, Features="Moisture Resistant", Height=0.32mm, Lead Free="Lead Free", Length=1mm, Manufacturer Part Number=RC0402FR-071ML, Military Standard=Not, Number of Terminations=2, Packaging="Tape and Reel", Power Rating=63mW, Pricing 1="1=0.10000, 10=0.01600, 100=0.00640, 1000=0.00286, 2500=0.00248, 5000=0.00205 (USD)", Pricing 2="1=0.10000, 10=0.01200, 50=0.01200, 100=0.00400, 1000=0.00400, 10000=0.00300 (USD)", Pricing 3="10000=0.00290, 50000=0.00200 (GBP)", REACH SVHC=Unknown, RoHS=Yes, RoHS Compliant=Yes, Series=RC, Size Code=0402, Stock 1=7856490, Stock 2=1194490, Stock 3=1530000, Supplier 1=Digi-Key, Supplier 2=Mouser, Supplier 3=Farnell, Supplier Part Number 2=603-RC0402FR-071ML, Supplier Part Number 3=2421892, Technology="THICK FILM", Termination=SMD/SMT, Tolerance=1%
R2: "RES SMD 330K OHM 1% 1/16W 0402", Case Code (Imperial)=0402, Case Code (Metric)=1005, Manufacturer=Yageo, Max Operating Temperature=155°C, Max Power Dissipation=63mW, Min Operating Temperature=-55°C, Package Quantity=1, Resistance=330kR, Resistance Tolerance=1%, Resistor Type="Thick Film", Supplier Part Number 1=311-330KLRCT-ND, Temperature Coefficient=100ppm/°C, Voltage Rating=50V, Case/Package=0402, Category="Chip SMD Resistors", Checked By=?, ComponentLink1Description="Online datasheet", ComponentLink1URL=https://datasheet.ciiva.com/2518/pyu-r-int-thick-7-2518994.pdf?src-supplier=Digi-Key, Construction=Rectangular, Created By="D Gakure", Depth=0.5mm, Features="Moisture Resistant", Height=0.016inch, Lead Free="Lead Free", Length=1mm, Manufacturer Part Number=RC0402FR-07330KL, Military Standard=Not, Number of Terminations=2, Packaging="Tape and Reel", Power Rating=63mW, Pricing 1="1=0.10000, 10=0.01600, 100=0.00660, 1000=0.00299, 2500=0.00259, 5000=0.00214 (USD)", Pricing 2="1=0.10000, 10=0.01400, 50=0.01400, 100=0.00500, 1000=0.00300, 10000=0.00200 (USD)", Pricing 3="10=0.01210, 100=0.00460, 500=0.00410, 2500=0.00310, 5000=0.00280, 10000=0.00250, 50000=0.00180 (GBP)", REACH SVHC=Unknown, RoHS=Yes, RoHS Compliant=Yes, Series=RC, Size Code=0402, Stock 1=78809, Stock 2=218637, Stock 3=310234, Supplier 1=Digi-Key, Supplier 2=Mouser, Supplier 3=Farnell, Supplier Part Number 2=603-RC0402FR-07330KL, Supplier Part Number 3=9239537, Termination=SMD/SMT, Tolerance=1%, Width=0.02inch
R3 R4: "RES SMD 5.1K OHM 5% 1/16W 0402", Case Code (Imperial)=0402, Case Code (Metric)=1005, Manufacturer=Yageo, Max Operating Temperature=155°C, Max Power Dissipation=63mW, Min Operating Temperature=-55°C, Power Rating=62.5mW, Resistance=5.1kR, Resistance Tolerance=5%, Resistor Type="Thick Film", Supplier Part Number 1=311-5.1KJRCT-ND, Temperature Coefficient=100ppm/°C, Voltage Rating=50V, Case/Package=0402, Category="Chip SMD Resistors", Checked By=?, ComponentLink2Description="Onnline datasheet", ComponentLink2URL=https://datasheet.ciiva.com/16740/pyu-rc0402-51-rohs-l-6-r-16740925.pdf, Construction=Rectangular, Created By="D. Gakure", Depth=0.5mm, Features="Moisture Resistant", Height=0.35mm, Lead Free="Lead Free", Length=1mm, Manufacturer Part Number=RC0402JR-075K1L, Military Standard=Not, Number of Terminations=2, Packaging="Tape and Reel", Pricing 1="1=0.10000, 10=0.01300, 100=0.00520, 1000=0.00233, 2500=0.00202, 5000=0.00167 (USD)", Pricing 2="1=0.10000, 25=0.01000, 100=0.00400, 250=0.00400, 500=0.00300, 1000=0.00300 (USD)", Pricing 3="1=0.10000, 10=0.01000, 50=0.01000, 100=0.00400, 1000=0.00300, 10000=0.00200 (USD)", Pricing 4="10=0.00910, 100=0.00390, 500=0.00320, 2500=0.00240, 5000=0.00210, 10000=0.00190, 50000=0.00150 (GBP)", Pricing 5="10000=0.00270 (GBP)", REACH SVHC="No SVHC", RoHS=Yes, RoHS Compliant=Yes, Series=RC, Size Code=0402, Stock 1=1270619, Stock 2=1265, Stock 3=100817, Stock 4=68890, Stock 5=1265, Supplier 1=Digi-Key, Supplier 2=Newark, Supplier 3=Mouser, Supplier 4=Farnell, Supplier 5=Farnell, Supplier Part Number 2=68R0016, Supplier Part Number 3=603-RC0402JR-075K1L, Supplier Part Number 4=3495714, Supplier Part Number 5=1799293, Termination=SMD/SMT, Tolerance=5%, Voltage Rating (DC)=50V, Weight=2.3E-05oz, Width=0.5mm
R5 R9 R10 R13: "RES SMD 150 OHM 1% 1/16W 0402", Case Code (Imperial)=0402, Case Code (Metric)=1005, Manufacturer=Yageo, Max Operating Temperature=155°C, Max Power Dissipation=63mW, Min Operating Temperature=-55°C, Package Quantity=1, Power Rating=62.5mW, Resistance=150R, Resistance Tolerance=1%, Resistor Type="Thick Film", Supplier Part Number 1=311-150LRCT-ND, Temperature Coefficient=100ppm/°C, Voltage Rating=50V, Case/Package=0402, Category="Chip SMD Resistors", Checked By=?, ComponentLink1Description="ine datasheet", ComponentLink1URL=https://datasheet.ciiva.com/11808/0900766b80c66297-11808422.pdf, Construction=Rectangular, Created By="D. Gakure", Depth=0.5mm, Features="Moisture Resistant", Height=0.016inch, Lead Free="Lead Free", Length=1mm, Manufacturer Part Number=RC0402FR-07150RL, Military Standard=Not, Number of Terminations=2, Packaging="Tape and Reel", Pricing 1="1=0.10000, 10=0.01400, 100=0.00580, 1000=0.00260, 2500=0.00226, 5000=0.00186 (USD)", Pricing 2="1=0.10000, 10=0.01200, 50=0.01200, 100=0.00400, 1000=0.00400, 10000=0.00300 (USD)", Pricing 3="10000=0.00270, 50000=0.00200 (GBP)", REACH SVHC="No SVHC", RoHS=Yes, RoHS Compliant=Yes, Series=RC, Stock 1=5214533, Stock 2=582717, Stock 3=880000, Supplier 1=Digi-Key, Supplier 2=Mouser, Supplier 3=Farnell, Supplier Part Number 2=603-RC0402FR-07150RL, Supplier Part Number 3=2421893, Technology="THICK FILM", Termination=SMD/SMT, Tolerance=1%, Width=0.02inch, Working Voltage=50V
R6: "RES SMD 52.3K OHM 1% 1/16W 0402", Case Code (Imperial)=0402, Case Code (Metric)=1005, Manufacturer=Yageo, Max Operating Temperature=155°C, Max Power Dissipation=63mW, Min Operating Temperature=-55°C, Power Rating=62.5mW, Resistance=52.3kR, Resistor Type="Thick Film", Supplier Part Number 1=YAG3179CT-ND, Temperature Coefficient=100ppm/°C, Tolerance=1%, Voltage Rating=50V, Case/Package=0402, Category="Chip SMD Resistors", Checked By=?, ComponentLink1Description="Oline datasheet", ComponentLink1URL=https://datasheet.ciiva.com/16867/pyu-rc0402-51-rohs-l-6-16867930.pdf, Construction=Rectangular, Contact Plating=Tin,Matte, Created By="D. Gakure", Depth=0.5mm, Features="Moisture Resistant", Height=0.016inch, Lead Free="Lead Free", Length=1mm, Manufacturer Part Number=RC0402FR-0752K3L, Military Standard=Not, Number of Terminations=2, Packaging="Tape and Reel", Pricing 1="1=0.10000, 10=0.01600, 100=0.00640, 1000=0.00286, 2500=0.00248, 5000=0.00205 (USD)", Pricing 2="1=0.10000, 10=0.01200, 50=0.01200, 100=0.00400, 1000=0.00300, 10000=0.00300 (USD)", RoHS=Yes, RoHS Compliant=Yes, Series=RC, Size Code=0402, Stock 1=1178310, Stock 2=83620, Supplier 1=Digi-Key, Supplier 2=Mouser, Supplier Part Number 2=603-RC0402FR-0752K3L, Termination=SMD/SMT, Voltage Rating (DC)=50V, Weight=2.3E-05oz, Width=0.02inch
R7: "RES SMD 68K OHM 1% 1/16W 0402", Case Code (Imperial)=0402, Case Code (Metric)=1005, Manufacturer=Yageo, Max Operating Temperature=125°C, Max Power Dissipation=63mW, Min Operating Temperature=-55°C, Package Quantity=10000, Power Rating=62.5mW, Resistance=68kR, Resistor Type="Thin Film", Supplier Part Number 1=13-RT0402FRE0768KLCT-ND, Temperature Coefficient=50ppm/°C, Tolerance=1%, Voltage Rating=50V, Case/Package=0402, Category="Chip SMD Resistors", Checked By=?, ComponentLink1Description="Online datasheet", ComponentLink1URL=https://datasheet.ciiva.com/2561/pyu-rt-1-to-0-05-rohs-l-5-2561824.pdf?src-supplier=Digi-Key, Contact Plating=Tin,Matte, Created By="D. Gakure", Height=0.014inch, Lead Free="Lead Free", Length=0.039inch, Manufacturer Part Number=RT0402FRE0768KL, Number of Terminations=2, Packaging="Tape and Reel", Pricing 1="1=0.10000, 10=0.07000, 100=0.02830, 1000=0.01272, 2500=0.01104, 5000=0.00912 (USD)", Pricing 2="1=0.24000, 10=0.05600, 50=0.05600, 100=0.01900, 1000=0.01400, 10000=0.00800 (USD)", Radiation Hardening=No, RoHS=Yes, RoHS Compliant=Yes, Series=RT, Stock 1=19319, Stock 2=28756, Supplier 1=Digi-Key, Supplier 2=Mouser, Supplier Part Number 2=603-RT0402FRE0768KL, Termination=SMD/SMT, Voltage Rating (DC)=50V, Width=0.02inch
R11 R12: "RES SMD 30 OHM 1% 1/16W 0402", Case Code (Imperial)=0402, Case Code (Metric)=1005, Manufacturer=Yageo, Max Operating Temperature=155°C, Max Power Dissipation=63mW, Min Operating Temperature=-55°C, Resistance=30R, Resistance Tolerance=1%, Resistor Type="Thick Film", Supplier Part Number 1=311-30LRCT-ND, Temperature Coefficient=100ppm/°C, Voltage Rating=50V, Case/Package=0402, Category="Chip SMD Resistors", Checked By=?, ComponentLink1Description="Online datasheet", ComponentLink1URL=https://datasheet.ciiva.com/7849/1018594-7849958.pdf, Construction=Rectangular, Contact Plating=Tin,Matte, Created By="D. Gakure", Depth=0.5mm, Features="Moisture Resistant", Height=0.35mm, Lead Free="Lead Free", Length=1mm, Manufacturer Part Number=RC0402FR-0730RL, Military Standard=Not, Number of Terminations=2, Packaging="Tape and Reel", Power Rating=63mW, Pricing 1="1=0.10000, 10=0.01400, 100=0.00580, 1000=0.00260, 2500=0.00226, 5000=0.00186 (USD)", Pricing 2="1=0.10000, 10=0.01200, 50=0.01200, 100=0.00400, 1000=0.00400, 10000=0.00300 (USD)", Pricing 3="10=0.01210, 100=0.00420, 500=0.00370, 2500=0.00280, 5000=0.00250, 10000=0.00230, 50000=0.00150 (GBP)", REACH SVHC=Unknown, RoHS=Yes, RoHS Compliant=Yes, Series=RC, Size Code=0402, Stock 1=2973, Stock 2=41804, Stock 3=4422, Supplier 1=Digi-Key, Supplier 2=Mouser, Supplier 3=Farnell, Supplier Part Number 2=603-RC0402FR-0730RL, Supplier Part Number 3=1458775, Termination=SMD/SMT, Tolerance=1%, Voltage Rating (DC)=50V, Width=0.5mm
R14: "RES SMD 220 OHM 1% 1/16W 0402", Case Code (Imperial)=0402, Case Code (Metric)=1005, Manufacturer=Yageo, Max Operating Temperature=155°C, Max Power Dissipation=63mW, Min Operating Temperature=-55°C, Package Quantity=1, Power Rating=62.5mW, Resistance=220R, Resistor Type="Thick Film", Supplier Part Number 1=311-220LRCT-ND, Temperature Coefficient=100ppm/°C, Tolerance=1%, Voltage Rating=50V, Case/Package=0402, Category=Resistors, Checked=?, ComponentLink1Description=https://datasheet.ciiva.com/11819/0900766b80c66297-11819466.pdf?src-supplier=RSComponents, ComponentLink1URL=https://datasheet.ciiva.com/11819/0900766b80c66297-11819466.pdf?src-supplier=RSComponents, ComponentLink2Description=https://datasheet.ciiva.com/2453/pyu-r-int-thick-7-2453460.pdf?src-supplier=Digi-Key, ComponentLink2URL=https://datasheet.ciiva.com/2453/pyu-r-int-thick-7-2453460.pdf?src-supplier=Digi-Key, ComponentLink3Description=https://datasheet.ciiva.com/2453/pyu-r-int-thick-7-2453461.pdf?src-supplier=Digi-Key, ComponentLink3URL=https://datasheet.ciiva.com/2453/pyu-r-int-thick-7-2453461.pdf?src-supplier=Digi-Key, ComponentLink4Description=https://datasheet.ciiva.com/2453/pyu-r-int-thick-7-2453462.pdf?src-supplier=Digi-Key, ComponentLink4URL=https://datasheet.ciiva.com/2453/pyu-r-int-thick-7-2453462.pdf?src-supplier=Digi-Key, ComponentLink5Description=https://datasheet.ciiva.com/16746/pyu-rc0402-51-rohs-l-6-r-16746831.pdf?src-supplier=Future+Electronics, ComponentLink5URL=https://datasheet.ciiva.com/16746/pyu-rc0402-51-rohs-l-6-r-16746831.pdf?src-supplier=Future+Electronics, Created=D.G, Depth=0.5mm, Features="Moisture Resistant", Height=0.016inch, Lead Free="Lead Free", Length=1mm, Manufacturer Part Number=RC0402FR-07220RL, Military Standard=Not, Number of Pins=2, Number of Terminations=2, Packaging="Tape and Reel", Pricing 1="1=0.10000, 10=0.01400, 100=0.00580, 1000=0.00262, 2500=0.00228, 5000=0.00188 (USD)", Pricing 2="1=0.10000, 10=0.01200, 100=0.00400, 1000=0.00400, 2500=0.00400, 10000=0.00300 (USD)", Pricing 3="1=0.08130, 25=0.01210, 100=0.01120, 250=0.01030, 500=0.00900 (GBP)", REACH SVHC="No SVHC", RoHS=Yes, Stock 1=1286042, Stock 2=324625, Stock 3=18234, Supplier 1=Digi-Key, Supplier 2=Mouser, Supplier 3=Farnell, Supplier Part Number 2=603-RC0402FR-07220RL, Supplier Part Number 3=2147864, Termination=SMD/SMT, Voltage Rating (DC)=50V, Width=0.02inch
R15: "100 Ohms ±1% 0.333W, 1/3W Chip Resistor 0805 (2012 Metric) Pulse Withstanding Thick Film", Case Code (Imperial)=0805, Case Code (Metric)=2012, Manufacturer="TE Connectivity", Max Operating Temperature=155°C, Max Power Dissipation=333mW, Min Operating Temperature=-55°C, Resistance=100R, Resistor Type="Thick Film", Supplier Part Number 1=A130465CT-ND, Temperature Coefficient=200ppm/°C, Tolerance=1%, Case/Package=0805, Category="Chip SMD Resistors", Checked By=?, ComponentLink1Description="Online datasheet", ComponentLink1URL=https://www.te.com/commerce/DocumentDelivery/DDEController?Action=showdoc&DocId=Data+Sheet%7F9-1773463-9%7FA%7Fpdf%7FEnglish%7FENG_DS_9-1773463-9_A.pdf%7F1-2176327-3, Created By="D. Gakure", Manufacturer Part Number=CRGP0805F100R, Number of Terminations=2, Packaging="Cut Tape", Pricing 1="1=0.21000, 10=0.17600, 100=0.06870, 1000=0.02877, 2500=0.02637 (USD)", Pricing 2="1=0.20000, 10=0.17500, 50=0.17500, 100=0.06800, 1000=0.02600, 10000=0.02000 (USD)", Pricing 3="10=0.14300, 100=0.06350, 500=0.04220, 1000=0.02090, 2500=0.01980, 5000=0.01650, 25000=0.01440 (GBP)", RoHS=Yes, RoHS Compliant=Yes, Stock 1=6960, Stock 2=4703, Stock 3=3670, Supplier 1=Digi-Key, Supplier 2=Mouser, Supplier 3=Farnell, Supplier Part Number 2=279-CRGP0805F100R, Supplier Part Number 3=2861083
R16: "RES SMD 100K OHM 1% 1/16W 0402", Case Code (Imperial)=0402, Case Code (Metric)=1005, Manufacturer=Yageo, Max Operating Temperature=155°C, Max Power Dissipation=63mW, Min Operating Temperature=-55°C, Package Quantity=1, Resistance=100kR, Resistor Type="Thick Film", Supplier Part Number 1=311-100KLRCT-ND, Temperature Coefficient=100ppm/°C, Tolerance=1%, Voltage Rating=50V, Case/Package=0402, Category=Resistors, Checked By=?, ComponentLink2Description="Online datasheet", ComponentLink2URL=https://datasheet.ciiva.com/2453/pyu-r-int-thick-7-2453361.pdf, Created By=DG, Depth=0.5mm, Features="Moisture Resistant", Height=0.016inch, Lead Free="Lead Free", Length=0.039inch, Manufacturer Part Number=RC0402FR-07100KL, Military Standard=Not, Number of Terminations=2, Packaging="Tape and Reel", Power Rating=63mW, Pricing 1="1=0.10000, 10=0.01400, 100=0.00580, 1000=0.00262, 2500=0.00228, 5000=0.00188 (USD)", Pricing 2="1=0.10000, 10=0.01200, 100=0.00400, 1000=0.00400, 2500=0.00400, 10000=0.00300 (USD)", Pricing 3="1=0.10200, 25=0.01220, 100=0.01200, 250=0.01020, 500=0.00890 (GBP)", REACH SVHC="No SVHC", RoHS=Yes, Stock 1=5819191, Stock 2=4458847, Stock 3=19392, Supplier 1=Digi-Key, Supplier 2=Mouser, Supplier 3=Farnell, Supplier Part Number 2=603-RC0402FR-07100KL, Supplier Part Number 3=2131798, Termination=SMD/SMT, Width=0.02inch, Working Voltage=50V
SW1: "SWITCH TACTILE SSPST 50mA @ 12VDC", Current Rating="50 mA", Manufacturer=USAKRO, Operating Force="3.9 N", Supplier 1 Part Number=C493283, Voltage Rating DC="12 VDC", Actuator=Oval, ComponentLink1Description="Online datasheet", ComponentLink1URL=https://datasheet.ciiva.com/18514/pts810-4mar13-18514167.pdf, Contact Form=SPST, Manufacturer Part Number=UK-B0267-SP25Y, Mounting Style=SMD/SMT, Product Category="Tactile Switches", RoHS=Details, Supplier 1=LCSC, Switch Function="OFF - (ON)"
TP2 TP3 TP4 TP5 TP6: "Test Point"
U1: library part NCP114ASN330T1G, "ON SEMICONDUCTOR - NCP114ASN330T1G - LDO Voltage Regulator, Fixed, 1.7 V to 5.5 V in, 3.3 V/300 mA out, 150 mV drop, TSOP-5", Case/Package=SOT-23-5, Dropout Voltage=225mV, Manufacturer="ON Semiconductor", Max Input Voltage=5.5V, Max Operating Temperature=85°C, Min Operating Temperature=-40°C, Min Output Voltage=3.3V, Output Current=300mA, Power Supply Rejection Ratio (PSRR)=75dB, Quiescent Current=95uA, Supplier Part Number 1=NCP114ASN330T1GOSCT-ND, Category="Voltage Regulators - Linear", Checked=?, ComponentLink3Description="On Semi datasheet online", ComponentLink3URL=http://www.onsemi.com/pub/Collateral/NCP114-D.PDF, Created=DG, Lead Free="Lead Free", Manufacturer Part Number=NCP114ASN330T1G, Mount="Surface Mount", Number of Regulators=1, Output Configuration=Positive, Output Type=Fixed, Packaging="Cut Tape", Pricing 1="1=0.33000, 10=0.24900, 25=0.21760, 100=0.12440, 250=0.11664, 500=0.09330, 1000=0.07153 (USD)", RoHS=No, Stock 1=32529, Supplier 1=Digi-Key, Supplier 2=RSComponents, Supplier 3=Mouser, Supplier Part Number 2=1263178, Supplier Part Number 3=863-NCP114ASN330T1G
U2: "IC PWR SWITCH N-CHAN 1:1 SOT23-6", Case/Package=SOT-23, Manufacturer="Texas Instruments", Max Input Voltage=6.5V, Max Operating Temperature=85°C, Max Power Dissipation=625mW, Min Input Voltage=2.5V, Min Operating Temperature=-40°C, On-State Resistance=85mR, Output Current=1.5A, Package Quantity=1, Supplier Part Number 1=296-32464-1-ND, Category="Hot Swap Controllers", ComponentLink1Description="Online datasheet", ComponentLink1URL=https://datasheet.ciiva.com/15108/getdatasheetpartid-297517-15108509.pdf, Lead Free="Lead Free", Manufacturer Part Number=TPS2553DBVR, Max Supply Voltage=6.5V, Min Supply Voltage=2.5V, Number of Outputs=1, Number of Pins=6, Packaging="Tape and Reel", Pricing 1="1=1.20000, 10=1.07100, 25=1.01640, 100=0.78050, 250=0.68972, 500=0.65340, 1000=0.50820 (USD)", Radiation Hardening=No, REACH SVHC="No SVHC", RoHS=Yes, Stock 1=14713, Supplier 1=Digi-Key, Supplier 2=Farnell, Supplier 3=Mouser, Supplier Part Number 2=3124082, Supplier Part Number 3=595-TPS2553DBVR, Weight=0.00127oz
U4: library part BM833, "Fanstel Nordic nRF52833 module", Manufacturer 1=Fanstel, Supplier Part Number 1=1914-BM833CT-ND, Category="RF Receivers, Transceivers", ComponentLink1Description="Datasheet (offline)", ComponentLink1URL="Y:\System\Altium\Libraries 2014\Fanstel\Datasheets\BM833_datasheets.pdf", ComponentLink2Description="Datasheet (online)", ComponentLink2URL=https://www.fanstel.com/s/BM833_datasheets-rs9l.pdf, Manufacturer Part Number 1=BM833, Pricing 1="1=10.43000, 10=9.55900, 25=8.69000, 100=7.82100, 250=7.16924, 500=6.51750 (USD)", RoHS=No, Stock 1=879, Supplier 1=Digi-Key, Supplier 2=Mouser, Supplier Part Number 2=308-BM833

## Via types
v1: diameter 0.6, hole 0.3, Top Layer to Bottom Layer, tented both sides, 60 vias

## Nets (pads, with @x,y where several pads share a name; then routed paths per layer and width w, separated by ;. In a path a pad name is that pad's centre, name@x,y a point inside that pad or via, vN(x,y) a via of type N, cw(c..) or ccw(c..) an arc to the next point about the centre after c; other vN are vias at no path point)
3V3: C2.2 C7.2 D4.1 D7.2 J1.1 R1.1 R2.1 R8.1 U1.5 U4.14 U4.28 U4.56 | length 55.1
  Top Layer w0.3: U4.14 -3.483,18.583 -2.998,18.583 v1(-2.981,18.565) ; v1@-2.966,18.596 -2.962,18.6 U4.56 -0.475,19.225 1.375,19.225 U4.28 2.8,17.8 3.025,17.575 6.175,17.575 C7.2 6.229,17.621 6.77,17.621 v1(6.774,17.618)
  Top Layer w0.5: D7.2 -7.425,11.975 -7.425,12.125 -5.739,13.811 -5.739,13.87 v1(-5.72,13.89) ; D4.1 0.825,15.405 0.871,15.452 1.698,15.452 1.875,15.275 R1.1@1.925,15.275 ; D4.1@0.9,15.48 1.107,15.687 1.107,16.041 v1(1.126,16.06) ; R2.1@7.299,10.666 7.548,10.418 7.548,10.365 v1(7.567,10.346) ; v1@7.593,10.372 7.815,10.15 7.88,10.15 8.475,9.555 C2.2 U1.5
  Bottom Layer w0.3: v1(-5.72,13.89) -6.941,15.111 -6.941,17.605 -5.981,18.565 v1@-3.014,18.565 ; v1(1.126,16.06) v1@1.126,16.141
  Bottom Layer w0.5: v1(1.126,16.06) 1.126,10.267 2.3,9.093 2.655,8.738 4.822,8.738 6.999,10.914 ; v1(7.567,10.346) 6.999,10.914 ; J1.1 8.664,21.166 8.957,20.874 8.957,18.468 8.074,17.585 7.66,17.585 7.646,17.598 6.793,17.598 v1(6.774,17.618) 6.134,16.978 6.134,14.276 6.999,13.411 6.999,10.914
\I\L\I\M\_\C\T\R\L\: Q1.1 R8.2 U4.10 | length 16.6
  Top Layer w0.3: Q1.1 -4.625,12.975 -4.475,13.125 -4.475,14.2 R8.2 ; U4.10 v1(-3.041,20.8)
  Bottom Layer w0.25: v1(-5.35,12.675) -6.22,12.675 -8.05,14.505 -8.05,19.218 -7.396,19.872 -4.363,19.872 -4.123,19.632 -3.305,19.632 -3.041,19.896 v1(-3.041,20.8)
\I\L\I\M\_\E\N\A\B\L\E\: Q2.1 R1.2 U4.34 | length 9.3